# Altium PCB PCB1.PcbDoc
Units mm, origin at the board's own origin, x right, y up, seen from the top; angles counter-clockwise.
Board outline 155.25 x 130.25 mm, 2 copper layers (Top Layer, Bottom Layer); 19 components, 34 nets, 177 pads, 0 vias.
Unrouted connection lines stored in the file: 1.
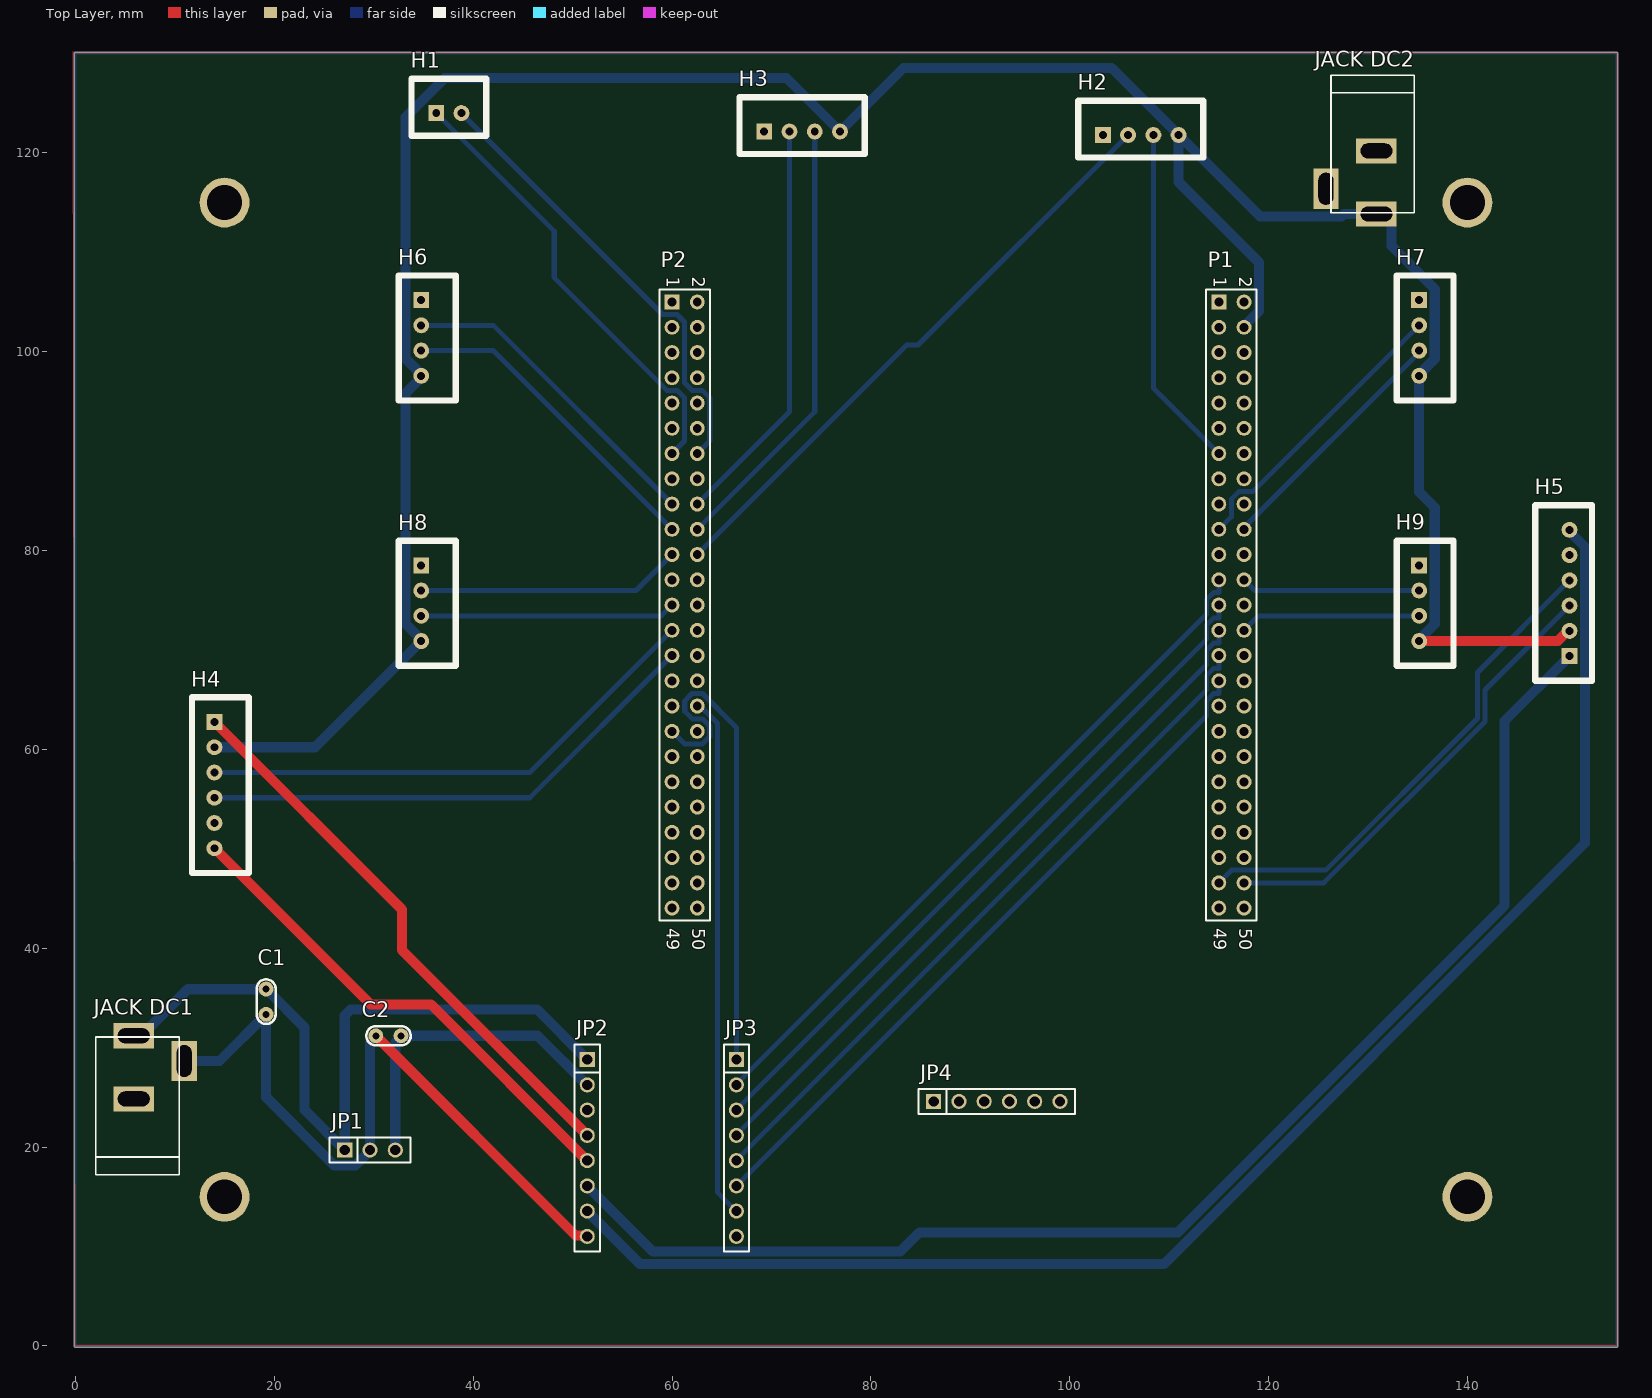
[diagram p0: Top Layer view]
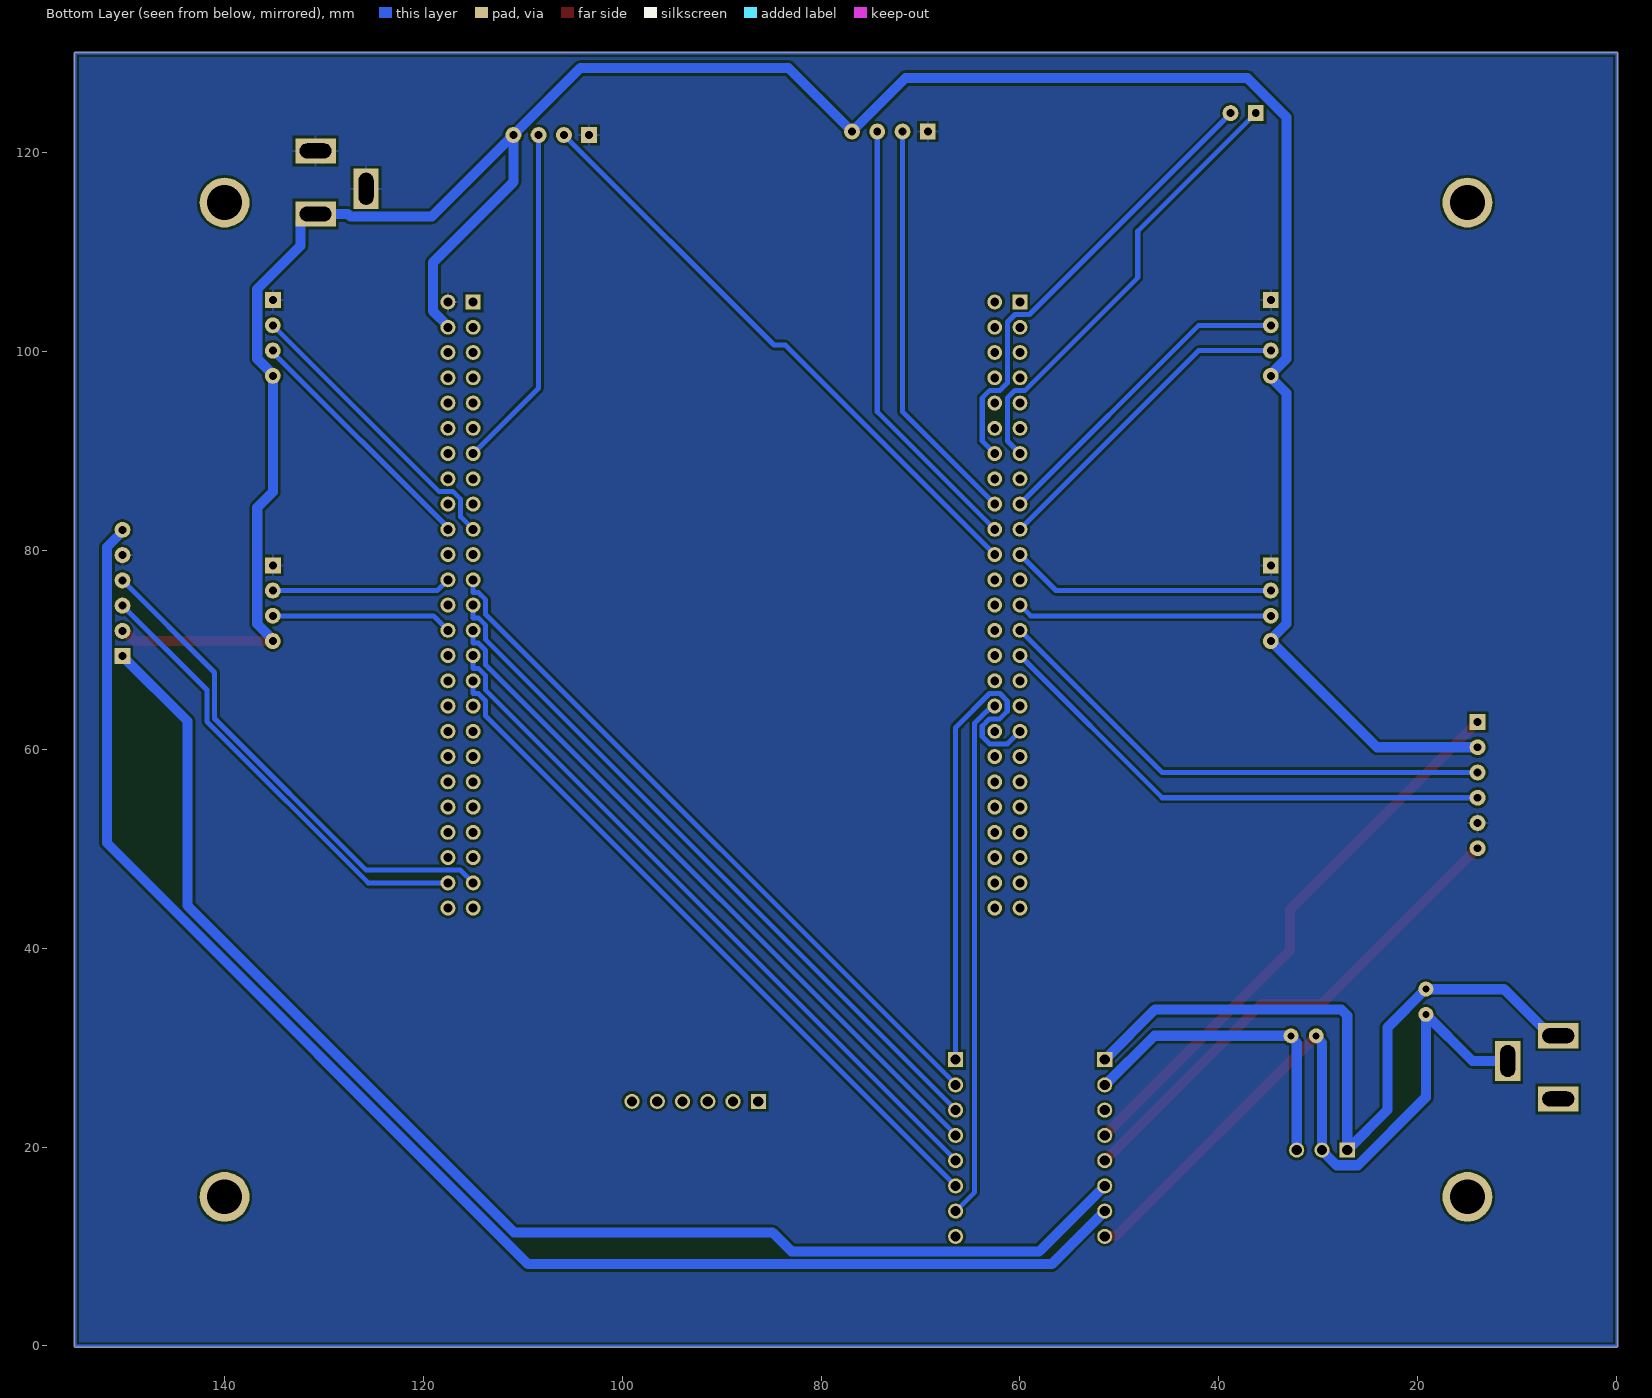
[diagram p1: Bottom Layer view, seen from below]
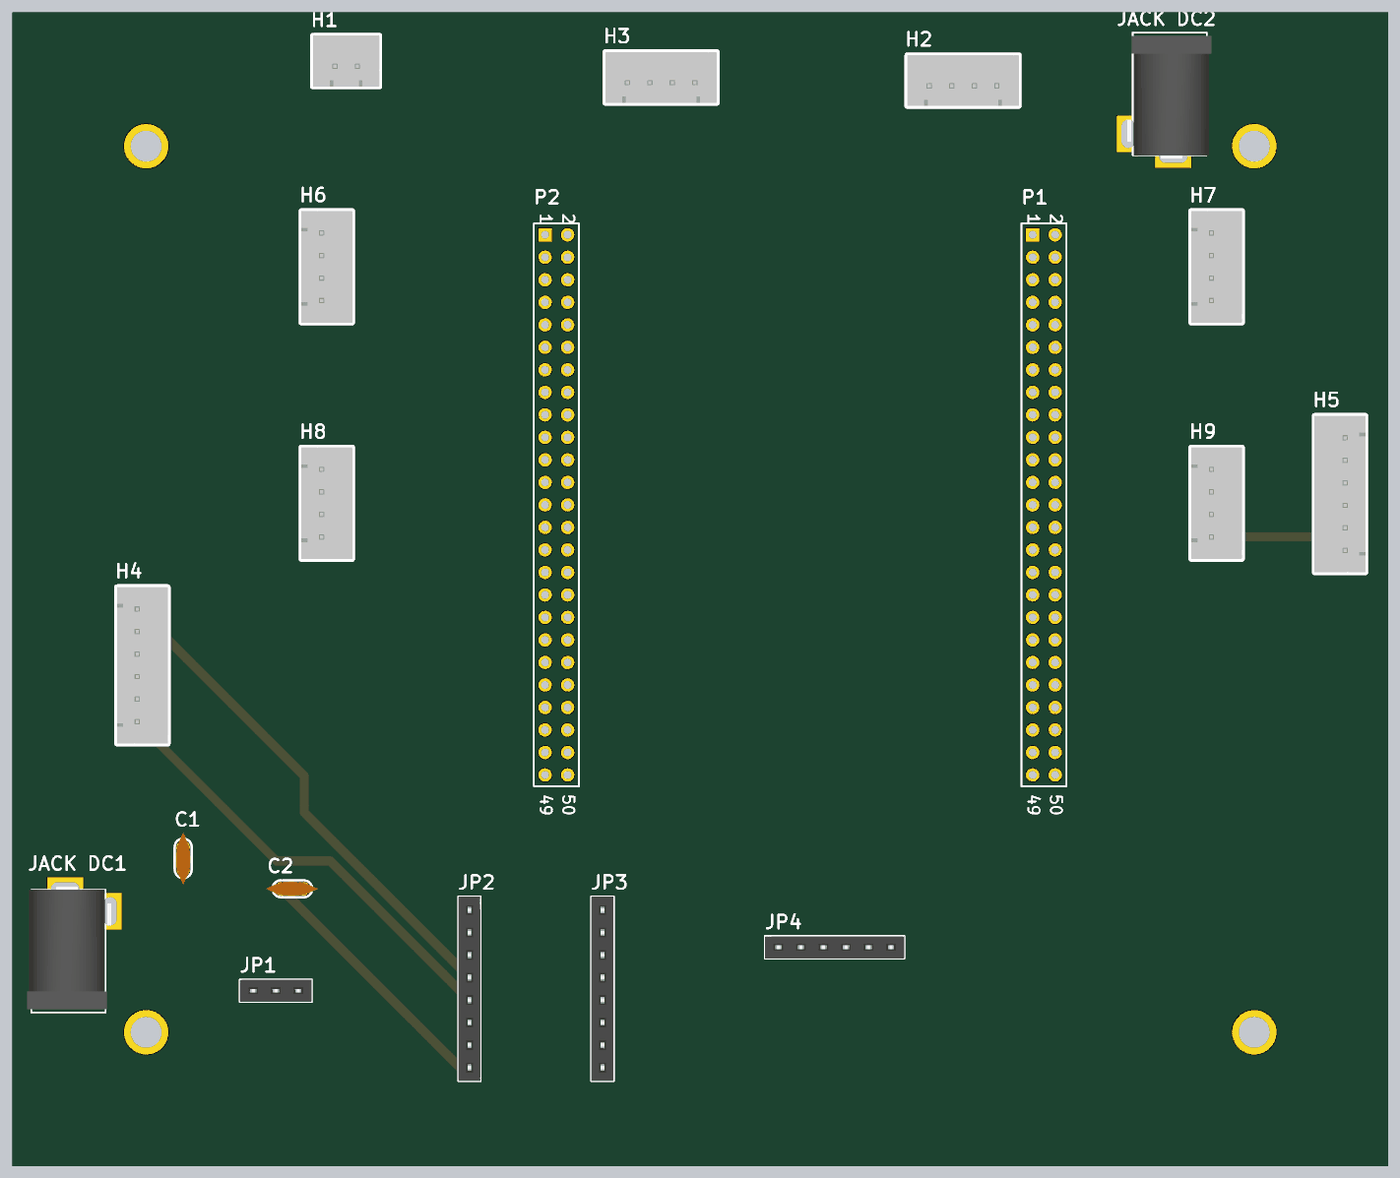
[diagram p2: 3D render of the assembled board from above, using the file's embedded part models]

## Layer stack, top to bottom
Top Solder: solder mask 0.0102, Solder Resist, Dk 3.5
Top Layer: signal copper 0.0356
Dielectric 1: dielectric 0.32, FR-4, Dk 4.8
Bottom Layer: signal copper 0.0356
Bottom Solder: solder mask 0.0102, Solder Resist, Dk 3.5

## Board outline
-0.127,0 ccw(c0,0) 0,-0.127 155,-0.127 ccw(c155,0) 155.127,0 155.127,130 ccw(c155,130) 155,130.127 0,130.127 ccw(c0,130) -0.127,130

## Design rules (kind name [scope] priority, off if disabled: settings)
Clearance [All] p1: gap=0.254 ignorepadtopadclearanceinfootprint=FALSE except(0: Arc-Hole Track-Hole SMDPad-Hole THPad-Hole Via-Hole Fill-Hole Poly-Hole Region-Hole Text-Hole)
PolygonConnect [All] p1: connectstyle=Relief reliefconductorwidth=0.254 reliefentries=4 polygonreliefangle="90 Angle" airgapwidth=0.254
RoutingVias [All] p1: holewidth=0.711 width=1.27 viastyle="Through Hole" minholewidth=0.711 minwidth=1.27 maxholewidth=0.711 maxwidth=1.27
SolderMaskExpansion [All] p1: expansion=0.102 istentingtop=FALSE
Width [All] p1: maxlimit=1.016 minlimit=0.254 preferedwidth=0.508
30 further rules are at their usual default settings.

## Components (designator, comment, footprint, x,y, rotation, side; value= is the part's Value field where it differs from the comment)
C1 "221" "tu gom" 19.175,34.625 r270 top
C2 "221" "tu gom" 31.475,31.2 r180 top
H1 "Header 2P 2.54 Duc Thang" XH2.54M-2 36.285,124 r0 top
H2 "Header 4P 2.54 Duc Thang" XH2.54M-4 103.335,121.8 r0 top
H3 "Header 4P 2.54 Duc Thang" XH2.54M-4 69.275,122.15 r0 top
H4 "Header 6P 2.54 Duc Thang" XH2.54M-6 13.975,62.76 r270 top
H5 "Header 6P 2.54 Duc Thang" XH2.54M-6 150.275,69.385 r90 top
H6 "Header 4P 2.54 Duc Thang" XH2.54M-4 34.775,105.195 r270 top
H7 "Header 4P 2.54 Duc Thang" XH2.54M-4 135.15,105.195 r270 top
H8 "Header 4P 2.54 Duc Thang" XH2.54M-4 34.775,78.52 r270 top
H9 "Header 4P 2.54 Duc Thang" XH2.54M-4 135.15,78.52 r270 top
"JACK DC1" "JACK DC 12V" "JACK DC 5.5" 8.4,28.025 r90 top value="Jac DC"
"JACK DC2" "JACK DC 5.5" "JACK DC 5.5" 128.31,117.025 r270 top value="Jac DC"
JP1 "JP 1x3 2.54" "JP 1x3 CT" 27.085,19.7 r0 top
JP2 "JP 1x8 2.54" "JP 1x8 CT" 51.475,28.8 r270 top
JP3 "JP 1x8 2.54" "JP 1x8 CT" 66.475,28.8 r270 top
JP4 "JP 1x6 2.54" "JP 1x6 CT" 86.32,24.6 r0 top
P1 "Header 25X2" HDR2X25 115,105 r270 top
P2 "Header 25X2" HDR2X25 60,105 r270 top

## Footprints (in the part's own frame and the unit in brackets; to place one, negate y for a bottom-side part, rotate by r counter-clockwise, add the part's x,y. Pads: shape width x height; smd on the part's side, far side on the other; paste and mask are expansions set on the pad)
HDR2X25 [mm] "Connector; Header; 25x2 Position"
  rect 1.5x1.5 hole 0.9: 1(0,0)
  round 1.5 hole 0.9: 2(0,2.54) 3(2.54,0) 4(2.54,2.54) 5(5.08,0) 6(5.08,2.54) 7(7.62,0) 8(7.62,2.54) 9(10.16,0) 10(10.16,2.54) 11(12.7,0) 12(12.7,2.54) 13(15.24,0) 14(15.24,2.54) 15(17.78,0) 16(17.78,2.54) 17(20.32,0) 18(20.32,2.54) 19(22.86,0) 20(22.86,2.54) 21(25.4,0) 22(25.4,2.54) 23(27.94,0) 24(27.94,2.54) 25(30.48,0) 26(30.48,2.54) 27(33.02,0) 28(33.02,2.54) 29(35.56,0) 30(35.56,2.54) 31(38.1,0) 32(38.1,2.54) 33(40.64,0) 34(40.64,2.54) 35(43.18,0) 36(43.18,2.54) 37(45.72,0) 38(45.72,2.54) 39(48.26,0) 40(48.26,2.54) 41(50.8,0) 42(50.8,2.54) 43(53.34,0) 44(53.34,2.54) 45(55.88,0) 46(55.88,2.54) 47(58.42,0) 48(58.42,2.54) 49(60.96,0) 50(60.96,2.54)
  silkscreen extent -1.27,-1.27 62.23,3.81
"JACK DC 5.5" [mm] "Jac DC input"
  rect 2.54x4.064 hole 1.5 slot 3.2 at 90 deg: 1(3.175,2.54) 2(-3.175,2.54)
  rect 4.064x2.54 hole 1.5 slot 3.2 at 0 deg: 3(0.635,-2.54)
  silkscreen extent -10.79,-2.03 3.05,6.35, body extent -10.42,-2.67 3.4,6.84, height 11.02
"JP 1x3 CT" [mm]
  rect 1.52x1.52 hole 1.02: 1(0,0)
  round 1.52 hole 1.02: 2(2.54,0) 3(5.08,0)
  silkscreen extent -1.52,-1.27 6.6,1.27, body extent -1.52,-1.25 6.6,1.25, height 8.51
"JP 1x6 CT" [mm] "6 row, straight, gold plating"
  rect 1.52x1.52 hole 1.02: 1(0,0)
  round 1.52 hole 1.02: 2(2.54,0) 3(5.08,0) 4(7.62,0) 5(10.16,0) 6(12.7,0)
  silkscreen extent -1.52,-1.27 14.22,1.27, body extent -1.52,-1.25 14.22,1.25, height 8.51
"JP 1x8 CT" [mm] "8 row, straight, gold plating"
  rect 1.52x1.52 hole 1.02: 1(0,0)
  round 1.52 hole 1.02: 2(2.54,0) 3(5.08,0) 4(7.62,0) 5(10.16,0) 6(12.7,0) 7(15.24,0) 8(17.78,0)
  silkscreen extent -1.52,-1.27 19.3,1.27, body extent -1.52,-1.25 19.3,1.25, height 8.51
"tu gom" [mm] "Tu gom mini"
  round 1.5 hole 0.7: 1(-1.27,0) 2(1.27,0)
  silkscreen extent -2.25,-0.97 2.22,0.97, body extent -2.92,-0.85 2.92,0.85, height 6.12
XH2.54M-2 [mm]
  rect 1.6x1.6 hole 0.8: 1(0,0)
  round 1.6 hole 0.8: 2(2.54,0)
  silkscreen extent -2.48,-2.26 5.02,3.46, body extent -2.48,-2.26 5.02,3.48, height 6.91
XH2.54M-4 [mm]
  rect 1.6x1.6 hole 0.8: 1(0,0)
  round 1.6 hole 0.8: 2(2.54,0) 3(5.08,0) 4(7.62,0)
  silkscreen extent -2.48,-2.26 10.1,3.46, body extent -2.48,-2.26 10.1,3.48, height 6.91
XH2.54M-6 [mm]
  rect 1.6x1.6 hole 0.8: 1(0,0)
  round 1.6 hole 0.8: 2(2.54,0) 3(5.08,0) 4(7.62,0) 5(10.16,0) 6(12.7,0)
  silkscreen extent -2.48,-2.26 15.18,3.46, body extent -2.48,-2.26 15.18,3.48, height 6.91

## Part data
C1 C2: library part "Tu gom 221 50V", "Cắm", Chung_Loai=Cắm, Don_Vi=Con, Ma_Hang=MH004769, So_Chan=2, Ten_Linh_Kien="Tụ gốm 220P 221 50V"
H1 H2 H3 H4 H5 H6 H7 H8 H9: "Cắm", Chung_Loai=Cắm, Don_Vi=Con
  H1: Ma_Hang=MH001283, Ten_Linh_Kien="Header 2P XH2.54-2P Đực Thẳng"
  H2 H3 H6 H7 H8 H9: Ma_Hang=MH001285, Ten_Linh_Kien="Header 4P XH2.54-4P Đực Thẳng"
  H4 H5: Ma_Hang=MH001972, Ten_Linh_Kien="Header 6P XH2.54-6P Đực Thẳng"
"JACK DC1": library part "JACK DC 5.5", "JACK DC 5.5"
JP1: library part "JP 1x3 2.54 Cai Thang", "Cắm", Chung_Loai=Cắm, Don_Vi=Con, Ma_Hang=MH004006, Ten_Linh_Kien="Jump Đơn Cái 2.54MM 1x20P Thẳng"
JP2 JP3: library part "JP 1x8 2.54 Cai Thang", "Cắm", Chung_Loai=Cắm, Don_Vi=Con, Ma_Hang=MH004006, Ten_Linh_Kien="Jump Đơn Cái 2.54MM 1x20P Thẳng"
JP4: library part "JP 1x6 2.54 Cai Thang", "Cắm", Chung_Loai=Cắm, Don_Vi=Con, Ma_Hang=MH004006, Ten_Linh_Kien="Jump Đơn Cái 2.54MM 1x20P Thẳng"
P1 P2: "Header, 25-Pin, Dual row", LatestRevisionDate=17-Jul-2002, LatestRevisionNote="Re-released for DXP Platform.", Publisher="Altium Limited"

## Free pads (board coordinates)
  round 5 hole 3.5: 8(15,15) 8(15,115) 8(140,15) 8(140,115)

## Nets (pads, with @x,y where several pads share a name; then routed paths per layer and width w, separated by ;. In a path a pad name is that pad's centre, name@x,y a point inside that pad or via, vN(x,y) a via of type N, cw(c..) or ccw(c..) an arc to the next point about the centre after c; other vN are vias at no path point)
5V: "JACK DC2.1" H2.4 H3.4 H4.2 H5.2 H6.4 H7.4 H8.4 H9.4 P1.4 | length 277.1
  Top Layer w1.016: H9.4 149.092,70.9 150.117,71.925 H5.2
  Bottom Layer w1.016: H4.2 24.095,60.22 H8.4 34.775,71.058 33.213,72.62 33.213,95.855 34.775,97.417 H6.4 34.775,97.733 33.213,99.295 33.213,123.606 37.132,127.525 71.52,127.525 H3.4 83.279,128.534 104.221,128.534 H2.4 ; P1.4 117.54,102.591 119.052,104.103 119.052,108.959 110.955,117.056 H2.4 ; H9.4 135.15,71.058 136.712,72.62 136.712,84.324 135.15,85.886 H7.4 135.15,97.733 136.712,99.295 136.712,106.311 132.374,110.649 132.374,113.088 131.612,113.85 130.85,113.85 127.61,113.85 127.356,113.596 119.159,113.596 H2.4 ; H5.2@150.117,71.925 H5.2
5V_HA: C2.1 JP1.3 JP2.2 | length 32.5
  Bottom Layer w1.016: JP1.3 32.165,30.489 32.745,31.069 C2.1 46.477,31.2 51.417,26.26 JP2.2
12V: "JACK DC1.1" C1.1 JP1.1 JP2.1 | length 75
  Bottom Layer w1.016: 5.86,31.2 6.622,31.2 11.3,35.878 19.158,35.878 C1.1 23.05,32.02 23.05,23.735 JP1.1 27.085,33.24 27.68,33.835 46.44,33.835 JP2.1
ENA1_E9: H4.3 P2.27 | length 51.9
  Bottom Layer w0.508: H4.3 45.7,57.68 P2.27
ENA2_C6: H5.4 P1.47 | length 50.6
  Bottom Layer w0.508: P1.47 116.282,47.862 125.767,47.862 141.017,63.112 141.017,67.747 H5.4
ENB1_E11: H4.4 P2.29 | length 51.9
  Bottom Layer w0.508: H4.4 45.7,55.14 P2.29
ENB2_C7: H5.3 P1.48 | length 46.1
  Bottom Layer w0.508: P1.48 125.562,46.58 141.779,62.796 141.779,65.969 H5.3
GND: "JACK DC2.2" "JACK DC2.3" H2.1 H3.1 H4.5 H5.5 H6.1 H7.1 H8.1 H9.1 P1.2 | length 1.8
  Bottom Layer w1.016: 125.77,116.39 125.77,117.152 ; 130.088,119.438 130.85,120.2
GND_CL: "JACK DC1.2" "JACK DC1.3" C1.2 C2.2 JP1.2 JP2.8 | length 73.8
  Top Layer w1.016: C2.2 50.289,11.116 51.379,11.116 JP2.8
  Bottom Layer w1.016: 10.94,28.66 14.48,28.66 C1.2 19.175,25.012 26.009,18.178 28.161,18.178 29.625,19.642 JP1.2 29.625,30.489 30.205,31.069 C2.2
L1: JP3.3 P1.25 | length 71.2
  Bottom Layer w0.508: JP3.3 66.475,23.772 113.742,71.039 113.742,72.501 114.479,73.238 115,73.238 P1.25
L2: JP3.2 P1.23 | length 71.2
  Bottom Layer w0.508: JP3.2 66.475,26.312 113.742,73.579 113.742,75.041 114.479,75.778 115,75.778 P1.23
ML+: H4.1 JP2.4 | length 57.2
  Top Layer w1.016: H4.1 32.823,43.912 32.823,39.832 JP2.4
  Bottom Layer w1.016: JP2.4 JP2.4@51.475,21.316
ML-: H4.6 JP2.5 | length 50.5
  Top Layer w1.016: H4.6 29.693,34.342 35.773,34.342 JP2.5
MR+: H5.1 JP2.6 | length 137.2
  Bottom Layer w1.016: JP2.6 58.077,9.498 82.955,9.498 84.879,11.422 110.877,11.422 143.74,44.285 143.74,62.85 H5.1
MR-: H5.6 JP2.7 | length 152.3
  Bottom Layer w1.016: JP2.7 56.807,8.228 109.479,8.228 151.837,50.586 151.837,80.365 150.275,81.927 H5.6
PWM_L: JP3.1 P2.35 | length 50.2
  Bottom Layer w0.508: P2.35 61.258,60.562 63.061,60.562 63.798,61.299 63.798,62.341 63.061,63.078 62.043,63.078 61.282,63.839 61.282,64.881 62.019,65.618 63.061,65.618 66.475,62.204 JP3.1
PWM_R: JP3.7 P2.34 | length 52.6
  Bottom Layer w0.508: P2.34 62.808,64.36 63.328,63.84 63.377,63.84 64.56,62.657 64.56,15.475 JP3.7
R1: JP3.5 P1.29 | length 71.2
  Bottom Layer w0.508: JP3.5 66.475,18.692 113.742,65.959 113.742,67.421 114.479,68.158 115,68.158 P1.29
R2: JP3.6 P1.31 | length 71.2
  Bottom Layer w0.508: JP3.6 113.742,63.367 113.742,64.881 114.479,65.618 115,65.618 P1.31
RT_A2: H1.2 P2.14 | length 46.6
  Bottom Layer w0.508: H1.2 38.825,123.957 59.04,103.742 60.497,103.742 61.258,102.981 61.258,96.883 62.019,96.122 63.037,96.122 63.798,95.361 63.798,91.018 P2.14
RX_A3: H1.1 P2.13 | length 45.7
  Bottom Layer w0.508: H1.1 48.155,112.13 48.155,107.446 59.479,96.122 60.497,96.122 61.258,95.361 61.258,91.018 P2.13
STBY: JP3.4 P1.27 | length 71.2
  Bottom Layer w0.508: JP3.4 66.475,21.232 113.742,68.499 113.742,69.961 114.479,70.698 115,70.698 P1.27
T3_CH1_A6: H3.2 P2.18 | length 41.3
  Bottom Layer w0.508: P2.18 71.815,93.955 H3.2
T3_CH2_A7: H6.2 P2.17 | length 32.7
  Bottom Layer w0.508: H6.2 42.025,102.655 P2.17
T3_CH3_B0: H2.2 P2.22 | length 60.8
  Bottom Layer w0.508: P2.22 83.612,100.672 84.747,100.672 H2.2
T3_CH4_B1: H8.2 P2.21 | length 26.7
  Bottom Layer w0.508: H8.2 56.38,75.98 P2.21
T4_CH2_B7: H9.2 P1.24 | length 18.1
  Bottom Layer w0.508: P1.24 118.62,75.98 H9.2
T4_CH3_B8: H7.2 P1.19 | length 29.7
  Bottom Layer w0.508: P1.19 116.258,83.398 116.258,85.177 117.043,85.962 118.457,85.962 H7.2
Trig_T3_CH1_C4: H3.3 P2.20 | length 44.9
  Bottom Layer w0.508: P2.20 74.355,93.955 H3.3
Trig_T3_CH2_C5: H6.3 P2.19 | length 32.7
  Bottom Layer w0.508: H6.3 42.025,100.115 P2.19
Trig_T3_CH3_E4: H2.3 P1.13 | length 34.8
  Bottom Layer w0.508: H2.3 108.415,96.345 P1.13
Trig_T3_CH4_E7: H8.3 P2.25 | length 25.7
  Bottom Layer w0.508: H8.3 58.92,73.44 P2.25
Trig_T4_CH2_B3: H9.3 P1.28 | length 18.2
  Bottom Layer w0.508: P1.28 119,73.44 H9.3
Trig_T4_CH3_B9: H7.3 P1.20 | length 25.3
  Bottom Layer w0.508: P1.20 117.54,82.323 135.15,99.933 H7.3
pads on no net: JP2.3 JP3.8 JP4.1 JP4.2 JP4.3 JP4.4 JP4.5 JP4.6 P1.1 P1.3 P1.5 P1.6 P1.7 P1.8 P1.9 P1.10 P1.11 P1.12 P1.14 P1.15 P1.16 P1.17 P1.18 P1.21 P1.22 P1.26 P1.30 P1.32 P1.33 P1.34 P1.35 P1.36 P1.37 P1.38 P1.39 P1.40 P1.41 P1.42 P1.43 P1.44 P1.45 P1.46 P1.49 P1.50 P2.1 P2.2 P2.3 P2.4 P2.5 P2.6 P2.7 P2.8 P2.9 P2.10 P2.11 P2.12 P2.15 P2.16 P2.23 P2.24 P2.26 P2.28 P2.30 P2.31 P2.32 P2.33 P2.36 P2.37 P2.38 P2.39 P2.40 P2.41 P2.42 P2.43 P2.44 P2.45 P2.46 P2.47 P2.48 P2.49 P2.50
copper on no net: | length 690
  Bottom Layer w0.254: 0,120 0,0 ; 0,0 0,130 155,130 155,0 0,0

## Polygon pours and split planes (outlines as drawn)
no net on Top Layer "GND_top" (solid, remove dead copper, pour order 2): -0.2,130.175 -0.075,130.05 155,130.05 155,0.075 154.925,0 -0.025,0
GND on Bottom Layer "GND_top" (solid, remove dead copper, pour order 1): -0.175,130.2 0.025,130 155,130 155,0 0,0

## Text inside footprints (layer, text, board x,y; h text height)
P1: Top Overlay "2" at 117.032,107.54 h1.27 r270; Top Overlay "1" at 114.492,107.54 h1.27 r270; Top Overlay "49" at 114.492,42.008 h1.27 r270; Top Overlay "50" at 117.032,42.008 h1.27 r270
P2: Top Overlay "2" at 62.032,107.54 h1.27 r270; Top Overlay "1" at 59.492,107.54 h1.27 r270; Top Overlay "49" at 59.492,42.008 h1.27 r270; Top Overlay "50" at 62.032,42.008 h1.27 r270